# Altium PCB ESP32_MCU.PcbDoc
Units mm, origin at the board's own origin, x right, y up, seen from the top; angles counter-clockwise.
Board outline 139.96 x 71.98 mm, 2 copper layers (Top Layer, Bottom Layer); 34 components, 17 nets, 128 pads, 29 vias.
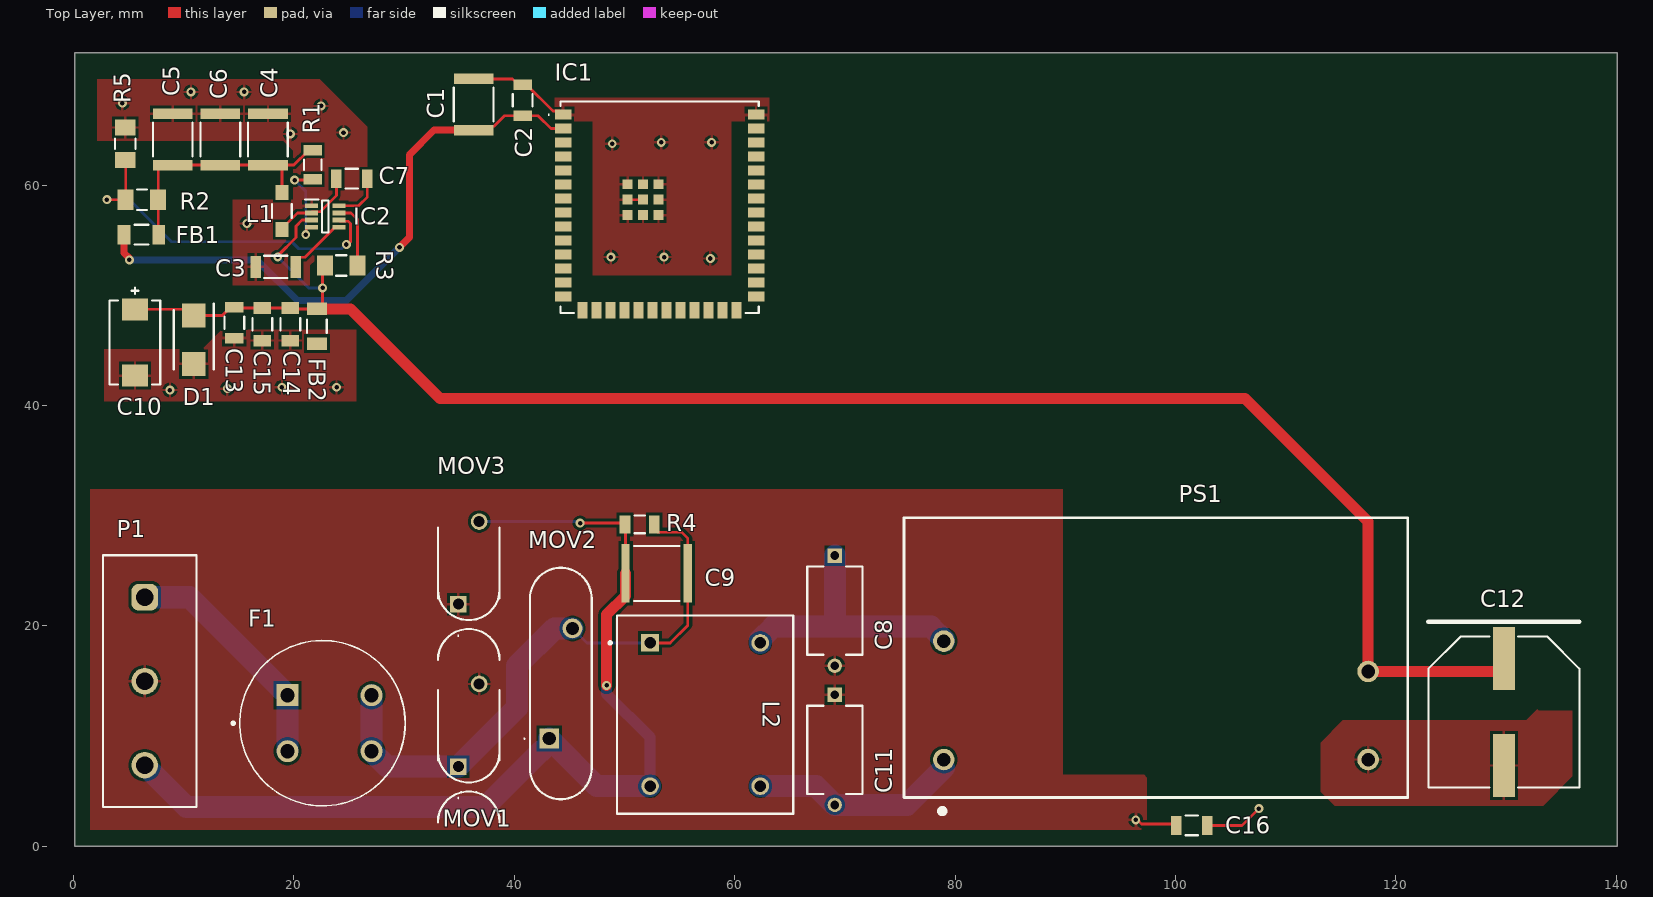
[diagram p0: Top Layer view]
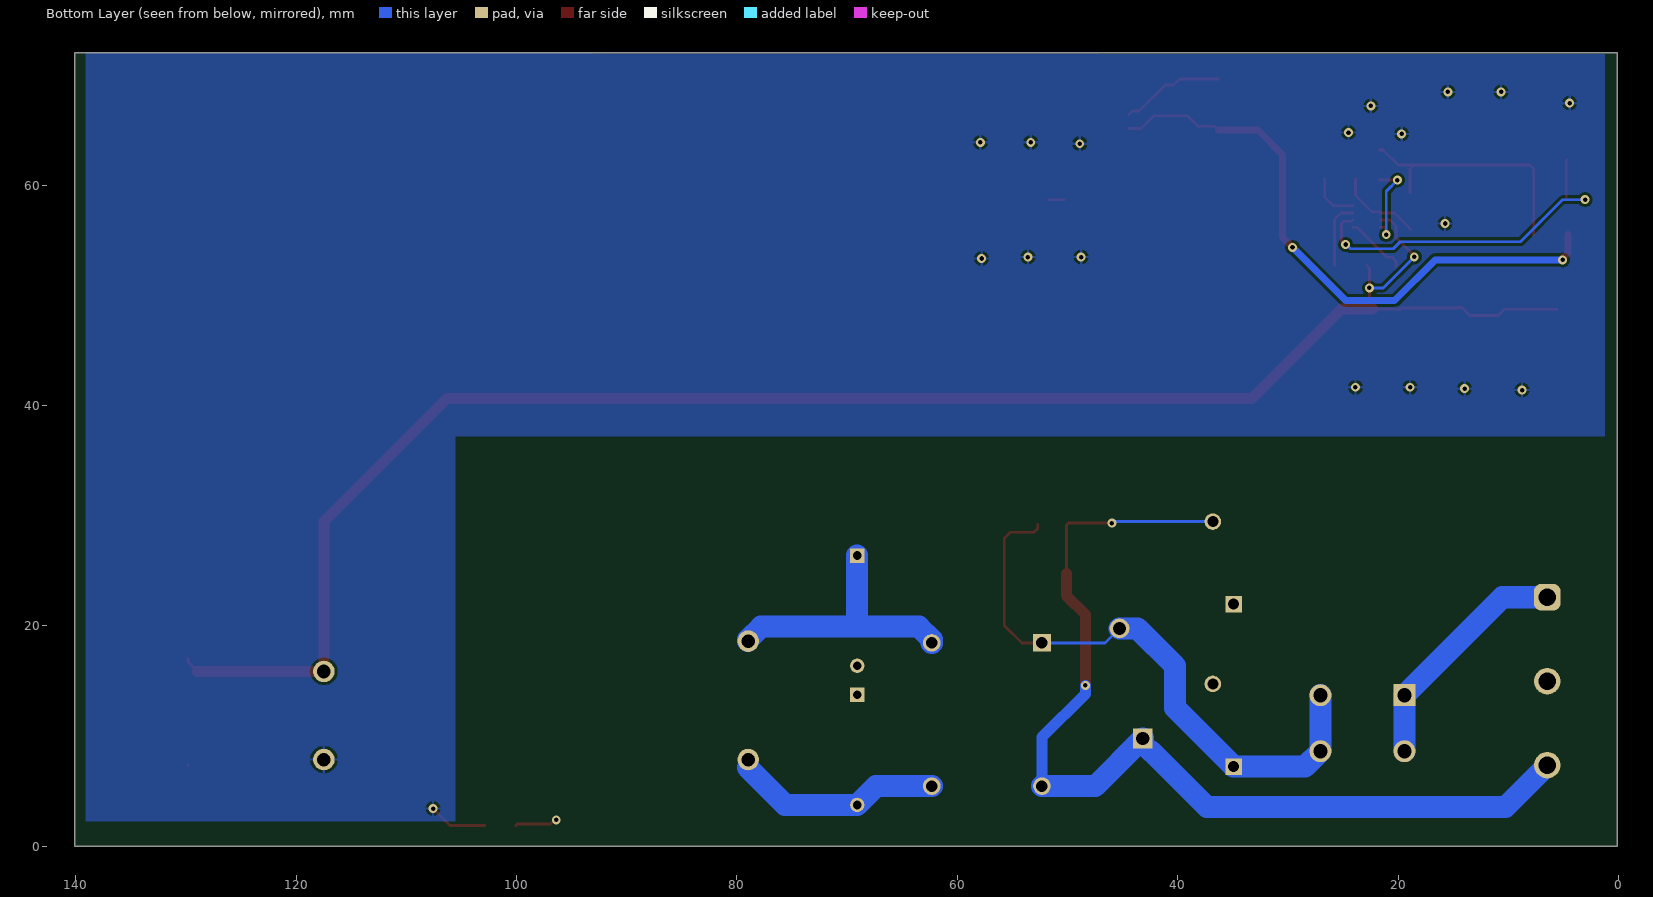
[diagram p1: Bottom Layer view, seen from below]
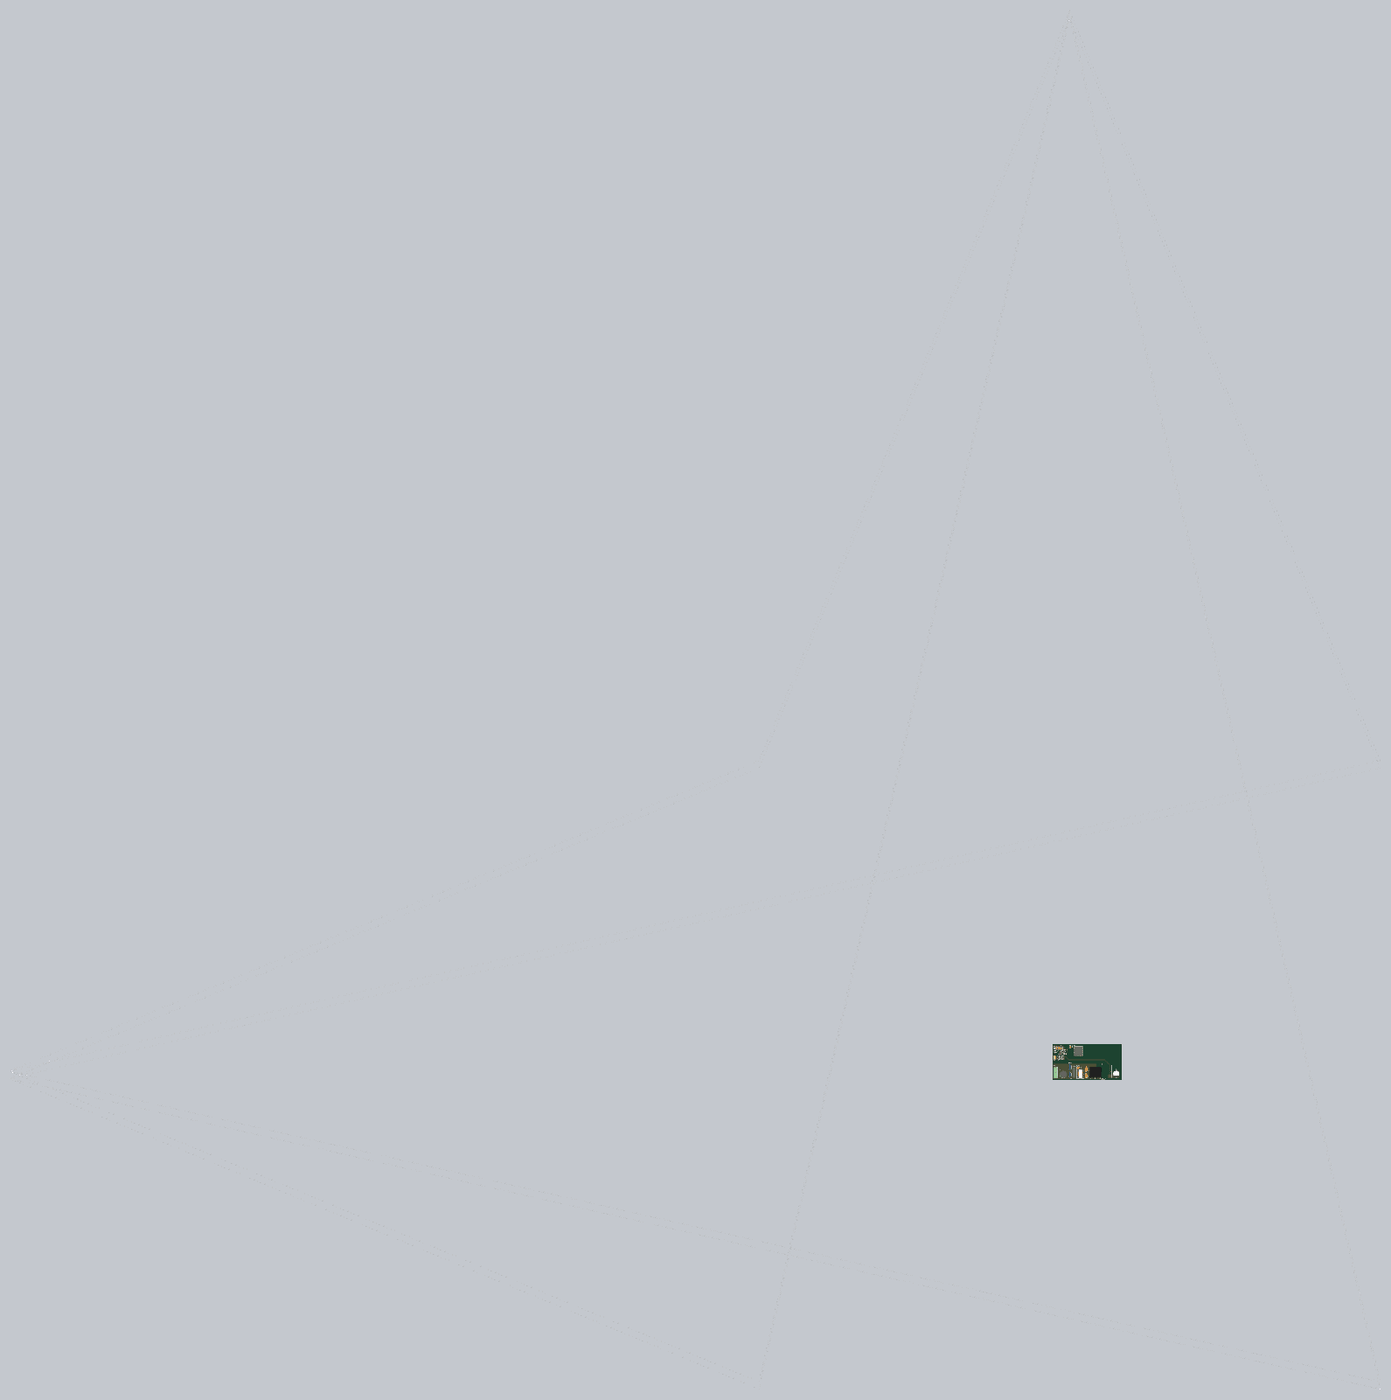
[diagram p2: 3D render of the assembled board from above, using the file's embedded part models]

## Layer stack, top to bottom
Top Solder: solder mask 0.0102, Solder Resist, Dk 3.5
Top Layer: signal copper 0.0356
Dielectric 1: dielectric 0.32, FR-4, Dk 4.8
Bottom Layer: signal copper 0.0356
Bottom Solder: solder mask 0.0102, Solder Resist, Dk 3.5

## Board outline
140.081,0.027 140.081,72.009 0.125,72.009 0.127,0.027

## Design rules (kind name [scope] priority, off if disabled: settings)
Clearance [All] p1: gap=0.254 ignorepadtopadclearanceinfootprint=TRUE except(0.1: Arc-SMDPad Track-SMDPad SMDPad-SMDPad)
MinimumSolderMaskSliver [All] p1: minsoldermaskwidth=0.127
PolygonConnect [All] p1: connectstyle=Relief reliefconductorwidth=0.254 reliefentries=4 polygonreliefangle="90 Angle" airgapwidth=0.254
RoutingVias [All] p1: holewidth=0.41 width=0.81 viastyle="Through Hole" minholewidth=0.4 minwidth=0.8 maxholewidth=0.711 maxwidth=1.27
SilkToSilkClearance [All] p1: silktosilkclearance=0.127
SilkToSolderMaskClearance [IsPad] p1: minsilkscreentomaskgap=0.1 clearancetoexposedcopper=TRUE
SolderMaskExpansion [All] p1: expansion=0.102 istentingtop=FALSE
UnRoutedNet [All] p1: checkbadconnections=TRUE
Width [All] p1: maxlimit=2 minlimit=0.127 preferedwidth=0.254 minimp=50.000000 maximp=50.000000 favimp=50.000000
26 further rules are at their usual default settings.

## Components (designator, comment, footprint, x,y, rotation, side; value= is the part's Value field where it differs from the comment)
C1 "C4532X7R1E226M250KC" FP-C4532-250-0_4-IPC_B 36.322,67.31 r90 top
C2 "C1206C104K2RACTU" FP-C1206C-EB-MFG 40.767,67.694 r90 top value="0.10 μF"
C3 "CGA5H4C0G2W822J115AA" FP-CGA5L-0_3-0_1-IPC_A 18.368,52.578 r180 top
C4 "C4532X7R1E226M250KC" FP-C4532-250-0_4-IPC_B 17.653,64.135 r90 top
C5 "C4532X7R1E226M250KC" FP-C4532-250-0_4-IPC_B 9.017,64.135 r90 top
C6 "C4532X7R1E226M250KC" FP-C4532-250-0_4-IPC_B 13.335,64.135 r90 top
C7 "C1206C104K2RACTU" FP-C1206C-EB-MFG 25.273,60.579 r180 top value="0.10 μF"
C8 "VY1102M31Y5UC63V0" FP-VY1102M31Y5UC63V0-MFG 69.088,21.383 r270 top
C9 "C5750JB2J224K230KA" FP-C5750-230-0_4-IPC_C 52.928,24.765 r180 top
C10 "T491D476K025AT" FP-T491D476K025AT-MFG 5.588,45.72 r90 top
C11 "VY1102M31Y5UC63V0" FP-VY1102M31Y5UC63V0-MFG 69.088,8.763 r270 top
C12 "EEVFK1J221Q" PNSC-FK-V-H13_V 129.794,12.192 r270 top
C13 "C1206C104K2RACTU" FP-C1206C-EB-MFG 14.605,47.498 r270 top value="0.10 μF"
C14 "GRM31CR61H106KA12L" FP-GRM31-0_2-MFG 19.685,47.371 r270 top value=10uF
C15 "GRM31CR61H106KA12L" FP-GRM31-0_2-MFG 17.145,47.371 r270 top value=10uF
C16 "C1206C104K2RACTU" FP-C1206C-EB-MFG 101.473,1.905 r0 top value="0.10 μF"
D1 "SMBJ20A-E3_52" DIOM5436X244N 10.922,45.974 r270 top
F1 "83100000005" FP-831-MFG 22.606,11.176 r0 top
FB1 "BLM31KN801BH1L" FP-BLM31-0_2-t1_6-MFG 6.172,55.499 r180 top
FB2 "BLM31KN801BH1L" FP-BLM31-0_2-t1_6-MFG 22.098,47.193 r270 top
IC1 "ESP32-S3-WROOM-1U-N16" ESP32S3WROOM1UN16 53.192,57.984 r0 top
IC2 "TPS563210ADDFR" SOT65P280X110-8N 22.86,57.15 r0 top
L1 "LQM31PN2R2M00L" FP-LQM31PN_00-MFG 18.923,57.658 r90 top
L2 "PLA10AN2030R5R2B" FP-PLA10A-PLH10A-MFG 57.324,11.961 r0 top
MOV1 "B72210S2301K101" B72210S2301K101 34.925,7.239 r90 top
MOV2 "S20K300" S20K300 43.18,9.779 r90 top
MOV3 "B72210S2301K101" B72210S2301K101 34.925,21.971 r90 top
P1 "691311400103" 691311400103 6.927,14.986 r270 top
PS1 "IRM-10-12" IRM-10 75.375,4.425 r0 top
R1 "CRCW1206100KJNEB" FP-CRCW1206-e3-IPC_C 21.717,61.849 r90 top
R2 "MCA1206MD1002BP100" FP-MCA1206-IPC_A 6.223,58.674 r0 top
R3 "MCA1206MD1002BP100" FP-MCA1206-IPC_A 24.305,52.705 r0 top
R4 "CRCW1206100KJNEB" FP-CRCW1206-e3-IPC_C 51.379,29.21 r0 top
R5 "MCA1206MD1002BP100" FP-MCA1206-IPC_A 4.699,63.754 r270 top

## Footprints (in the part's own frame and the unit in brackets; to place one, negate y for a bottom-side part, rotate by r counter-clockwise, add the part's x,y. Pads: shape width x height; smd on the part's side, far side on the other; paste and mask are expansions set on the pad)
691311400103 [mm] "7.62 mm - Closed Vertical PCB Header - 3p"
  rrect50% 2.4x2.4 hole 1.6: 1(-7.62,-0.45)
  round 2.4 hole 1.6: 2(0,-0.45) 3(7.62,-0.45)
  silkscreen extent -11.42,-4.25 11.42,4.25, body extent -11.43,-4.25 11.43,4.25, height 12.05
B72210S2301K101 [mm]
  rect 1.5x1.5 hole 1: 1(0,0)
  round 1.5 hole 1: 2(7.5,-1.9)
  silkscreen extent -5.05,-3.75 6.95,1.85, body extent -2,-2.5 9.5,0.6, height 13.49
DIOM5436X244N [mm]
  rect 2.2x2.15 smd: 1(-2.2,0) 2(2.2,0)
  silkscreen extent -3.27,-1.81 2.7,1.81, body extent -2.7,-1.81 2.7,1.81, height 2.44
ESP32S3WROOM1UN16 [mm]
  rect 1.5x0.9 smd: 1(-8.75,8.41) 2(-8.75,7.14) 3(-8.75,5.87) 4(-8.75,4.6) 5(-8.75,3.33) 6(-8.75,2.06) 7(-8.75,0.79) 8(-8.75,-0.48) 9(-8.75,-1.75) 10(-8.75,-3.02) 11(-8.75,-4.29) 12(-8.75,-5.56) 13(-8.75,-6.83) 14(-8.75,-8.1) 27(8.75,-8.1) 28(8.75,-6.83) 29(8.75,-5.56) 30(8.75,-4.29) 31(8.75,-3.02) 32(8.75,-1.75) 33(8.75,-0.48) 34(8.75,0.79) 35(8.75,2.06) 36(8.75,3.33) 37(8.75,4.6) 38(8.75,5.87) 39(8.75,7.14) 40(8.75,8.41)
  rect 0.9x1.5 smd: 15(-6.985,-9.35) 16(-5.715,-9.35) 17(-4.445,-9.35) 18(-3.175,-9.35) 19(-1.905,-9.35) 20(-0.635,-9.35) 21(0.635,-9.35) 22(1.905,-9.35) 23(3.175,-9.35) 24(4.445,-9.35) 25(5.715,-9.35) 26(6.985,-9.35)
  rect 0.9x0.9 smd: 41(-1.5,0.69) 42(-1.5,2.09) 43(-2.9,2.09) 44(-2.9,0.69) 45(-2.9,-0.71) 46(-1.5,-0.71) 47(-0.1,-0.71) 48(-0.1,0.69) 49(-0.1,2.09)
  silkscreen extent -10.1,-9.6 9,9.6, body extent -9,-9.6 9,9.6, height 3.45
FP-831-MFG [mm]
  round 2 hole 1.3 paste-2539.97 mask+0: 1(-3.17,-2.54) 2(4.45,-2.54) 2(4.45,2.54)
  rect 2x2 hole 1.3 paste-2539.97 mask+0: 1(-3.17,2.54)
  silkscreen extent -8.22,-7.5 7.5,7.5, body extent -7.6,-7.6 7.6,7.6, height 0.25
FP-BLM31-0_2-t1_6-MFG [mm]
  rect 1.15x1.8 smd paste+0 mask+0: 1(-1.575,0) 2(1.575,0)
  silkscreen extent -0.63,-0.9 0.63,0.9, body extent -2.25,-1 2.25,1, height 0.25
FP-C1206C-EB-MFG [mm]
  rect 0.95x1.7 smd paste+0 mask+0: 1(-1.4,0) 2(1.4,0)
  silkscreen extent -0.55,-0.9 0.55,0.9, body extent -2,-1 2,1, height 0.25
FP-C4532-250-0_4-IPC_B [mm]
  rect 0.953x3.603 smd paste+0 mask+0: 1(-2.325,0) 2(2.325,0)
  silkscreen extent -1.55,-1.8 1.55,1.8, body extent -3.05,-2.05 3.05,2.05, height 0.25
FP-C5750-230-0_4-IPC_C [mm]
  rect 0.753x5.303 smd paste+0 mask+0: 1(-2.825,0) 2(2.825,0)
  silkscreen extent -2.07,-2.5 2.07,2.5, body extent -3.3,-2.8 3.3,2.8, height 0.25
FP-CGA5L-0_3-0_1-IPC_A [mm]
  rect 0.956x2.006 smd paste+0 mask+0: 1(-1.825,0) 2(1.825,0)
  silkscreen extent -1.05,-1 1.05,1, body extent -2.8,-1.5 2.8,1.5, height 0.25
FP-CRCW1206-e3-IPC_C [mm]
  rect 0.956x1.658 smd paste+0 mask+0: 1(-1.326,0) 2(1.326,0)
  silkscreen extent -0.47,-0.8 0.47,0.8, body extent -1.9,-0.97 1.9,0.97, height 0.25
FP-GRM31-0_2-MFG [mm]
  rect 1.05x1.6 smd paste+0 mask+0: 1(-1.475,0) 2(1.475,0)
  silkscreen extent -0.58,-0.9 0.58,0.9, body extent -2.1,-1 2.1,1, height 0.25
FP-LQM31PN_00-MFG [mm]
  rect 1.35x1.2 smd paste+0 mask+0: 1(-1.675,0) 2(1.675,0)
  silkscreen extent -0.63,-0.9 0.63,0.9, body extent -2.45,-1 2.45,1, height 0.25
FP-MCA1206-IPC_A [mm]
  rect 1.456x1.858 smd paste+0 mask+0: 1(-1.476,0) 2(1.476,0)
  silkscreen extent -0.45,-0.93 0.45,0.93, body extent -2.7,-1.43 2.7,1.43, height 0.25
FP-PLA10A-PLH10A-MFG [mm]
  rect 1.6x1.6 hole 1.05 paste-2539.97 mask+0: 1(-5,6.5)
  round 1.6 hole 1.05 paste-2539.97 mask+0: 2(5,6.5) 3(5,-6.5) 4(-5,-6.5)
  silkscreen extent -8.75,-9 8,9, body extent -8.1,-9.1 8.1,9.1, height 0.25
FP-T491D476K025AT-MFG [mm]
  rect 1.99x2.33 smd paste+0 mask+0: 1(-3.01,0) 2(3.01,0)
  silkscreen extent -3.8,-2.3 5,2.3, body extent -4.13,-2.42 4.13,2.42, height 0.25
FP-VY1102M31Y5UC63V0-MFG [mm]
  rect 1.3x1.3 hole 0.8 paste-2539.97 mask+0: 1(-5,0)
  round 1.3 hole 0.8 paste-2539.97 mask+0: 2(5,0)
  silkscreen extent -4,-2.5 4,2.5, body extent -5.75,-2.6 5.75,2.6, height 0.25
IRM-10 [mm]
  round 1.95 hole 1.24: 1(3.6,3.45) 2(42.1,3.45) 3(42.1,11.45) 4(3.6,14.2)
  silkscreen extent 0,-1.34 45.7,25.4, body extent -0.33,-3.69 25.07,21.86, height 22.08
PNSC-FK-V-H13_V [mm] "CAPAE, 2-Leads, Body 13.70x13.70mm"
  rect 5.7x2 smd: 1(-4.85,0) 2(4.85,0)
  silkscreen extent -8.2,-6.85 6.85,6.85, body extent -7.5,-6.85 7.5,6.85, height 14
S20K300 [mm]
  rect 1.8x1.8 hole 1.2: 1(0,0)
  round 1.8 hole 1.2: 2(10,-2.1)
  silkscreen extent -5.5,-3.85 15.5,2.3, body extent -5.5,-3.85 15.5,1.75, height 25.6
SOT65P280X110-8N [mm]
  rect 1.2x0.45 smd: 1(-1.25,0.975) 2(-1.25,0.325) 3(-1.25,-0.325) 4(-1.25,-0.975) 5(1.25,-0.975) 6(1.25,-0.325) 7(1.25,0.325) 8(1.25,0.975)
  silkscreen extent -1.85,-1.45 0.3,1.55, body extent -1.41,-1.45 1.41,1.45, height 0.9

## Part data
C1 C4 C5 C6: library part CMP-08246-003643-1, "Multilayer Ceramic Capacitors 22uF ±20% 25V X7R SMD 1812", Capacitance=22uF, Case Code (Imperial)=1812, Case Code (Metric)=4532, Dielectric=X7R, Dielectric Material=Ceramic, Max Operating Temperature=125°C, Min Operating Temperature=-55°C, Package Quantity=1, Tolerance=20%, Voltage=25V, Case/Package=1812, Construction=Flat, Depth=3.2mm, Height=2.5mm, Lead Free="Lead Free", Length=4.5mm, Mount="Surface Mount", Number of Pins=2, Packaging="Tape and Reel", Radiation Hardening=No, REACH SVHC="No SVHC", Resistor Type=Ceramic, RoHS Compliant=Yes, Series=C, Termination=SMD/SMT, Thickness=0.11inch, Voltage Rating=25V, Voltage Rating (DC)=25V, Weight=0.000952oz, Width=0.126inch
C2 C7 C13 C16: library part CMP-1037-04222-2, "CAP CER 0.1UF 200V 10% X7R 1206", Capacitance="0.10 μF", Manufacturer=KEMET, Package=C1206C-EB, Temperature="-55°C to +150°C", Temperature Characteristic=X7R, Temperature Coefficient=15%, Temperature Range High=+150°C, Temperature Range Low=-55°C, Tolerance=0.1, Voltage Rating="200 V", Automotive=Yes, Automotive Grade="Grade 0", Category=Cap, ComponentLink2Description=Datasheet, ComponentLink2URL=https://content.kemet.com/datasheets/KEM_C1007_X8R_ULTRA_150C_SMD.pdf, Device Class L1="Passive Components", Device Class L2=Capacitors, Device Class L3="Ceramic Capacitors", Digikey Description="CAP CER 0.1UF 200V 10% X7R 1206", Height=0.88mm, Ipc Land Pattern Name=CAPC320160X78, Lead Free=Yes, Manufacturer Part Number=C1206C104K2RACTU, Material=Ceramic, Mouser Description="Multilayer Ceramic Capacitors MLCC - SMD/SMT 200volts 0.1uF X7R 10%", Octopart=https://octopart.com/c1206c104k2ractu-kemet-9138344, RoHS=TRUE
C3: library part CMP-08246-000279-1, "Cap Ceramic 8.2nF 450V C0G 5% Pad SMD 1206 +125°C Automotive T/R", Capacitance=8.2nF, Case Code (Imperial)=1206, Case Code (Metric)=3216, Dielectric=C0G, Max Operating Temperature=125°C, Min Operating Temperature=-55°C, Package Quantity=2000, Ratings=AEC-Q200, Tolerance=5%, Voltage Rating=450V, Case/Package=1206, Composition=Ceramic, Height=1.15mm, Length=0.126inch, Mount="Surface Mount", Packaging="Tape and Reel", Termination=SMD/SMT, Thickness=0.051inch, Voltage Rating (DC)=450V, Width=0.063inch
C8 C11: library part CMP-00030-59531954-1, "VY1102M31Y5UC63V0 1nF 500(Y1)V ac; 760(X1)V ac Ceramic Single Layer Cap; Y5U Dielectric VY1 Series", Capacitance=1nF, Case/Package=Radial, Dielectric=Y5U, Dielectric Material=Ceramic, Max Operating Temperature=125°C, Min Operating Temperature=-40°C, Ratings="X1, Y1", Tolerance=20%, Depth=5mm, Diameter=8mm, Dissipation Factor=2.5%, Height - Seated (Max)=11.9888mm, Lead Pitch=10.0076mm, Lead/Base Style=Kinked, Mount="Through Hole", NexarPartId=59531954, Packaging=Bulk, REACH SVHC=Unknown, RoHS=Compliant, Schedule B="8532230060, 8532230060", Termination=Radial
C9: library part CMP-08246-006666-1, "Multilayer Ceramic Capacitors 220nF ±10% 630V JB SMD 2220", Capacitance=220nF, Case Code (Imperial)=2220, Case Code (Metric)=5750, Max Operating Temperature=85°C, Min Operating Temperature=-25°C, Package Quantity=500, Resistor Type=Ceramic, Tolerance=10%, Voltage Rating=630V, Case/Package=2220, Height=2.3mm, Length=0.224inch, Mount="Surface Mount", Packaging="Tape and Reel", RoHS Compliant=Yes, Series=C, Termination=SMD/SMT, Thickness=0.098inch, Voltage Rating (DC)=630V, Width=5mm
C10: library part CMP-03017-000020-1, "CAP TANT 1UF 10% 25V 2917", Capacitance=1uF, Case Code (Imperial)=2917, Case Code (Metric)=7343, Dielectric Material=Tantalum, ESR (Equivalent Series Resistance)=700mR, Leakage Current=11.8uA, Max Operating Temperature=125°C, Min Operating Temperature=-55°C, Package Quantity=1, Ripple Current=463mA, Tolerance=10%, Voltage=25V, Case/Package=2917, Depth=4.3mm, Dissipation Factor=10%, Failure Rate=0.001%, Features="General Purpose", Height=2.8mm, Height - Seated (Max)=0.122inch, Lead Free="Lead Free", Length=7.3mm, Life (Hours)=2000Hour, Mount="Surface Mount", Number of Pins=2, Packaging="Tape and Reel", Polarity=Polar, Radiation Hardening=No, REACH SVHC="No SVHC", RoHS Compliant=Yes, Termination=SMD/SMT, Voltage Rating=25V, Voltage Rating (DC)=25V, Weight=0.023634oz, Width=4.3mm
C12: library part CMP-2000-06222-1, "Aluminum Electrolytic Capacitor, 220 uF, +/- 20%, 63 V, 2-Pin SMD (Size Code H13), -55 to 105 degC, RoHS, Tape and Reel", AE Capacitor Case=RadialCan-SMD, Capacitance=220µF, Capacitance Tolerance=±20%, Capacitor Case Style=SMD, Life Time @ Temperature=2000hours@105°C, Manufacturer=Panasonic, Operating life Time=2000h, Operating Temperature Max=105°C, Operating Temperature Min=-55°C, Operating Temperature Range=-55°Cto+105°C, Package / Case=H13, Package Description="2-Pin Electrolytic Aluminum Capacitor, Body 13.5 x 13.5 mm", Package Reference=FK-V-H13, Power Factor=0.08, Power Factor Frequency=120Hz, Ripple Current AC=800mA, Ripple Current Frequency=100kHz, Tolerance +=20%, Voltage Rating=63V, Capacitance Tolerance ±=±20%, Capacitor Terminals=SMD, Datasheet URL=https://industrial.panasonic.com/cdbs/www-data/pdf/RDE0000/ABA0000C1181.pdf, Datasheet Version=03/2016, Diameter=12.5mm, External Length / Height=13.5mm, Height=13.5mm, Impedance=0.16ohm, Lifetime @ Temperature=2000hours@105°C, Manufacturer URL=http://www.panasonic.com/, Mounting Technology=SurfaceMount, Operating Lifetime=2000h, Package URL=http://industrial.panasonic.com/cdbs/www-data/pdf/RDE0000/DME0000COL48.pdf, Packaging=CutTape, Product Range=PANASONIC-?????FK, Ripple Current Temperature=105°C, Series=FK, SVHC=NoSVHC(16-Dec-2013), Tolerance -=20%, Voltage Rating V DC=63V
C14 C15: library part CMP-2000-05256-2, "CAP CER 10UF 50V X5R 1206", Capacitance=10uF, Manufacturer="Murata Electronics North America", Package=GRM31-0.2, Temperature="-55°C to +85°C", Temperature Characteristic=X5R, Temperature Coefficient=15%, Temperature Range High=+85°C, Temperature Range Low=-55°C, Tolerance=10%, Voltage Rating=50V, Automotive=No, Category=Cap, ComponentLink2Description=Datasheet, ComponentLink2URL=https://search.murata.co.jp/Ceramy/image/img/A01X/G101/ENG/GRM31CR61H106KA12-01A.pdf, Device Class L1="Passive Components", Device Class L2=Capacitors, Device Class L3="Ceramic Capacitors", Digikey Description="CAP CER 10UF 50V X5R 1206", Height=1.8mm, Lead Free=Yes, Manufacturer Part Number=GRM31CR61H106KA12L, Material=Ceramic, Mouser Description="Multilayer Ceramic Capacitors MLCC - SMD/SMT 1206 10uF 50volt X5R +/-10%", Octopart=https://octopart.com/grm31cr61h106ka12l-murata-18903335, RoHS=TRUE
D1: "TVS Diode (Uni-directional)", Arrow Part Number=SMBJ20A-E3/52, Manufacturer_Name=Vishay, Mouser Part Number=625-SMBJ20A-E3, Arrow Price/Stock=https://www.arrow.com/en/products/smbj20a-e352/vishay?region=nac, Datasheet Link=http://www.vishay.com/docs/88392/smbj.pdf, Height=2.44mm, Manufacturer_Part_Number=SMBJ20A-E3/52, Mouser Price/Stock=https://www.mouser.co.uk/ProductDetail/Vishay-General-Semiconductor/SMBJ20A-E3-52?qs=%252BKsK5HlK7GGHijeGSDEfxQ%3D%3D
F1: library part CMP-08604-000006-1, "FUSE HOLDER CART 250V 6.3A PCB", Fuse Current=16A, Manufacturer="Littelfuse Inc", Package=831, Temperature="-25°C to +70°C", Temperature Range High=+70°C, Temperature Range Low=-25°C, Voltage Rating Ac=250V, Automotive=No, Category=Fuse, ComponentLink2Description=Datasheet, ComponentLink2URL=https://www.littelfuse.com/~/media/electronics/datasheets/fuse_holders/littelfuse_fuse_holder_830_831_834_datasheet.pdf.pdf, Conn Orientation=Vertical, Device Class L1="Circuit Protection", Device Class L2="Fuse Holders", Device Class L3=unset, Digikey Description="FUSE HOLDER CART 250V 6.3A PCB", Height=32.8mm, Lead Free=Yes, Manufacturer Part Number=83100000005, Mouser Description="Fuse Holder 5x20MM PCB MNT VERT BODY ONLY 4P", Number Of Fuses=1, Octopart=https://octopart.com/83100000005-littelfuse-743619, RoHS=TRUE, Standoff Height=0.6mm, Voltage Rating Dc=250V
FB1 FB2: library part CMP-06046-002315-1, "Chip Ferrite Bead, 1206, 800Ω @ 100MHz, 0.05Ω, 25%, 1.7A", Case Code (Imperial)=1206, Case Code (Metric)=3216, DC Resistance (DCR)=50mR, Max Current Rating=1.7A, Max Operating Temperature=150°C, Min Operating Temperature=-55°C, Ratings=AEC-Q200, Case/Package=1206, Mount="Surface Mount", Number of Lines=1, Packaging="Cut Tape", RoHS Compliant=Yes
IC1: "Integrated Circuit", Manufacturer_Name="Espressif Systems", Mouser Part Number=356-ESP32S3WROM1UN16, Datasheet Link=https://www.espressif.com/sites/default/files/documentation/esp32-s3-wroom-1_wroom-1u_datasheet_en.pdf, Height=3.35mm, Manufacturer_Part_Number=ESP32-S3-WROOM-1U-N16, Mouser Price/Stock=https://www.mouser.co.uk/ProductDetail/Espressif-Systems/ESP32-S3-WROOM-1U-N16?qs=Li%252BoUPsLEntAI1ynUyotnA%3D%3D
IC2: "Integrated Circuit", Manufacturer_Name="Texas Instruments", Mouser Part Number=595-TPS563210ADDFR, Arrow Part Number=TPS563210ADDFR, Arrow Price/Stock=https://www.arrow.com/en/products/tps563210addfr/texas-instruments, Datasheet Link=http://www.ti.com/lit/gpn/TPS563210A, Height=1.1mm, Manufacturer_Part_Number=TPS563210ADDFR, Mouser Price/Stock=https://www.mouser.co.uk/ProductDetail/Texas-Instruments/TPS563210ADDFR?qs=0C8XhJW8e4r80ZvhGvpDUQ%3D%3D
L1: library part CMP-06042-016285-1, "FIXED IND 2.2UH 900MA 190 MOHM", Case Code (Imperial)=1206, Case Code (Metric)=3216, Current Rating=900mA, DC Resistance (DCR)=190mR, Inductance=2.2uH, Inductance Tolerance=20%, Max Operating Temperature=125°C, Min Operating Temperature=-40°C, Package Quantity=3000, Self Resonant Frequency=40MHz, Test Frequency=1MHz, Case/Package=1206, Core Material=Ferrite, DC Current=900mA, Depth=1.8mm, Height=0.85mm, Lead Free="Lead Free", Length=3.2mm, Max DC Current=900mA, Military Standard=Not, Mount="Surface Mount", Packaging="Tape and Reel", Radiation Hardening=No, Rated Current-Max=900mA, REACH SVHC="No SVHC", RoHS Compliant=Yes, Series=LQM31P, Shielding=Shielded, Termination=SMD/SMT, Tolerance=20%, Width=1.6mm
L2: library part CMP-06045-000412-1, "Common Mode Choke Dual 20mH 0.5A 1.8Ω DCR Thru-Hole Bulk", Current=500mA, Current Rating=500uA, DC Resistance (DCR)=100mR, Inductance=20mH, Insulation Resistance=100MR, Max Operating Temperature=120°C, Min Operating Temperature=-25°C, Package Quantity=1260, Voltage Rating=300V, DC Current=500mA, Depth=16mm, Height=17.5mm, Lead Diameter=0.9mm, Lead Free="Lead Free", Lead Pitch=13mm, Lead/Base Style=Pin, Length=18mm, Max DC Current=500mA, Military Standard=Not, Mount="Through Hole", Number of Lines=2, Number of Pins=4, Packaging=Bulk, Parameter 1=2x20mH, Radiation Hardening=No, REACH SVHC="No SVHC", RMS Current (Irms)=500mA, Shielding=Unshielded, Termination=Radial, Voltage Rating (AC)=300V, Voltage Rating (DC)=300V, Width=0.63inch
MOV1 MOV3: "Varistor", Manufacturer_Name=TDK, Mouser Part Number=871-B72210S2301K101, Arrow Part Number=B72210S2301K101, Arrow Price/Stock=https://www.arrow.com/en/products/b72210s2301k101/tdk?region=nac, Datasheet Link=https://product.tdk.com/system/files/dam/doc/product/protection/voltage/lead-disk-varistor/data_sheet/70/db/var/siov_leaded_advanced.pdf, Height=14.5mm, Manufacturer_Part_Number=B72210S2301K101, Mouser Price/Stock=https://www.mouser.co.uk/ProductDetail/EPCOS-TDK/B72210S2301K101?qs=xN3cbABbNRaO1wG4NhAEjg%3D%3D
MOV2: "Varistor", Manufacturer_Name=TDK, Datasheet Link=https://www.tdk-electronics.tdk.com/inf/70/db/var/SIOV_Leaded_StandarD.pdf, Height=25.5mm, Manufacturer_Part_Number=S20K300
P1: library part CMP-1502-02409-2, Color=Green, Current=20A, Max Operating Temperature=105°C, Min Operating Temperature=-40°C, Voltage=300V, Contact Material=Brass, Current Rating=20A, Gender=Male, Height=12.15mm, Lead Pitch=7.62mm, Length=8.5mm, Mount="Through Hole", NexarPartId=18818299, Number of Contacts=3, Number of Levels=1, Number of Pins=3, Number of Positions Per Level=3, Number of Rows=1, Orientation=Vertical, Packaging=Box, Pitch=7.62mm, REACH SVHC=Unknown, RoHS=Compliant, Termination=Solder, Voltage Rating=300V, Width=22.86mm
PS1: "Power Supply", Manufacturer_Name="Mean Well", Mouser Part Number=709-IRM10-12, Arrow Part Number=IRM-10-12, Arrow Price/Stock=https://www.arrow.com/en/products/irm-10-12/mean-well-enterprises?region=europe, Datasheet Link=https://www.meanwellusa.com/webapp/product/search.aspx?prod=IRM-10, Manufacturer_Part_Number=IRM-10-12, Mouser Price/Stock=https://www.mouser.co.uk/ProductDetail/MEAN-WELL/IRM-10-12?qs=WkdRfq4wf1Mps3oD7xn11w%3D%3D
R1: library part CMP-02407-009021-1, "RES Thick Film, 100kΩ, 5%, 0.25W, 200ppm/°C, 1206", Case Code (Imperial)=1206, Case Code (Metric)=3216, Max Operating Temperature=155°C, Max Power Dissipation=250mW, Min Operating Temperature=-55°C, Package Quantity=10000, Resistance=100kR, Temperature Coefficient=200ppm/°C, Tolerance=5%, Voltage Rating=200V, Case/Package=1206, Composition="Thick Film", Contact Plating=Tin, Features="Automotive AEC-Q200", Height=0.024inch, Lead Free="Lead Free", Length=0.126inch, Number of Terminations=2, Packaging="Tape and Reel", Power Rating=250mW, Radiation Hardening=No, Weight=0.000353oz, Width=0.063inch
R2: library part CMP-02407-000300-1, "Res MC AT Precision Thin Film 1206 3.74kΩ 0.1% 0.4W ±25ppm/°C Molded Paper T/R", Case Code (Imperial)=1206, Case Code (Metric)=3216, Max Operating Temperature=155°C, Max Power Dissipation=400mW, Min Operating Temperature=-55°C, Package Quantity=1000, Resistance=3.74kR, Temperature Coefficient=25ppm/°C, Tolerance=0.1%, Voltage Rating=200V, Case/Package=1206, Composition="Thin Film", Features="Automotive AEC-Q200", Height=0.026inch, Length=0.126inch, Number of Terminations=2, Packaging="Tape and Reel", Power Rating=400mW, Termination=SMD/SMT, Weight=0.000353oz, Width=0.063inch
R3: library part CMP-02407-000300-1, "Res MC AT Precision Thin Film 1206 10kΩ 0.1% 0.4W ±25ppm/°C Molded Paper T/R", Case Code (Imperial)=1206, Case Code (Metric)=3216, Max Operating Temperature=155°C, Max Power Dissipation=400mW, Min Operating Temperature=-55°C, Package Quantity=1000, Resistance=10kR, Temperature Coefficient=25ppm/°C, Tolerance=0.1%, Voltage Rating=200V, Case/Package=1206, Composition="Thin Film", Features="Automotive AEC-Q200", Height=0.026inch, Length=0.126inch, Number of Terminations=2, Packaging="Tape and Reel", Power Rating=400mW, Termination=SMD/SMT, Weight=0.000353oz, Width=0.063inch
R4: library part CMP-02407-009021-1, "RES Thick Film, 1M, 5%, 0.25W, 200ppm/°C, 1206", Case Code (Imperial)=1206, Case Code (Metric)=3216, Max Operating Temperature=155°C, Max Power Dissipation=250mW, Min Operating Temperature=-55°C, Package Quantity=10000, Resistance=1MR, Temperature Coefficient=200ppm/°C, Tolerance=5%, Voltage Rating=200V, Case/Package=1206, Composition="Thick Film", Contact Plating=Tin, Features="Automotive AEC-Q200", Height=0.024inch, Lead Free="Lead Free", Length=0.126inch, Number of Terminations=2, Packaging="Tape and Reel", Power Rating=250mW, Radiation Hardening=No, Weight=0.000353oz, Width=0.063inch
R5: library part CMP-02407-000300-1, "Res MC AT Precision Thin Film 1206 33.2kΩ 0.1% 0.4W ±25ppm/°C Molded Paper T/R", Case Code (Imperial)=1206, Case Code (Metric)=3216, Max Operating Temperature=155°C, Max Power Dissipation=400mW, Min Operating Temperature=-55°C, Package Quantity=1000, Resistance=33.2kR, Temperature Coefficient=25ppm/°C, Tolerance=0.1%, Voltage Rating=200V, Case/Package=1206, Composition="Thin Film", Features="Automotive AEC-Q200", Height=0.026inch, Length=0.126inch, Number of Terminations=2, Packaging="Tape and Reel", Power Rating=400mW, Termination=SMD/SMT, Weight=0.000353oz, Width=0.063inch

## Via types
v1: diameter 0.81, hole 0.41, Top Layer to Bottom Layer, 29 vias

## Nets (pads, with @x,y where several pads share a name; then routed paths per layer and width w, separated by ;. In a path a pad name is that pad's centre, name@x,y a point inside that pad or via, vN(x,y) a via of type N, cw(c..) or ccw(c..) an arc to the next point about the centre after c; other vN are vias at no path point)
+3.3V: C1.1 C2.1 FB1.2 IC1.2 | length 55.2
  Top Layer w0.254: v1(5.08,53.213) v1@5.08,53.359 ; C1.1 36.672,65.335 38.157,65.335 39.116,66.294 C2.1 42.164,66.294 43.334,65.124 IC1.2
  Top Layer w0.64: FB1.2 4.597,53.842 v1@5.08,53.359 ; v1(29.591,54.356) 30.48,55.245 30.48,62.738 32.727,64.985 C1.1
  Bottom Layer w0.64: v1(5.08,53.213) 16.637,53.213 20.32,49.53 24.765,49.53 v1(29.591,54.356)
+12V: FB2.2
EARTH: C8.2 C11.1 C16.1 MOV1.2 MOV3.1 P1.2 | length 3.9
  Top Layer w0.254: v1(96.393,2.413) 96.543,2.413 96.924,2.032 99.946,2.032 C16.1
GND: C1.2 C2.2 C3.2 C4.2 C5.2 C6.2 C10.1 C12.2 C13.2 C14.2 C15.2 C16.2 D1.2 IC1.1 IC1.40 IC1.41 IC1.42 IC1.43 IC1.44 IC1.45 IC1.46 IC1.47 IC1.48 IC1.49 IC2.1 PS1.2 R5.1 | length 16.2
  Top Layer w0.254: C1.2 39.851,69.635 40.392,69.094 C2.2 41.142,69.094 43.519,66.717 44.119,66.717 IC1.1 ; IC1.44 IC1.41 ; C16.2 106.045,1.905 v1(107.569,3.429) ; C12.2 C12.2@129.794,7.382
  other v1: 8.763,41.402 13.97,41.529 18.923,41.656 23.876,41.656 57.798,53.34 48.768,53.467 53.594,53.467 15.748,56.515 48.895,63.754 53.34,63.881 57.912,63.881 19.685,64.643 24.511,64.77 22.479,67.183 4.445,67.437 10.668,68.453 15.494,68.453
NetC3_1: C3.1 IC2.5 | length 5.7
  Top Layer w0.254: C3.1 20.193,53.103 20.544,53.454 21.014,53.454 23.735,56.175 IC2.5
NetC4_1: C4.1 C5.1 C6.1 FB1.1 L1.2 R1.2 R2.2 | length 23.3
  Top Layer w0.254: FB1.1 7.699,55.547 R2.2 7.699,61.46 8.049,61.81 C5.1 C6.1 C4.1 C4.1@18.573,61.81 ; L1.2 18.923,61.46 C4.1@18.573,61.81 ; R1.2 21.366,63.175 20.001,61.81 C4.1@18.573,61.81
NetC7_1: C7.1 IC2.8 | length 4.5
  Top Layer w0.254: IC2.8 25.867,58.125 26.673,58.931 C7.1
NetC7_2: C7.2 IC2.2 L1.1 | length 7.8
  Top Layer w0.254: L1.1 18.923,56.058 20.34,57.475 IC2.2 21.708,57.573 22.394,57.573 23.873,59.052 C7.2
NetC8_1: C8.1 L2.2 PS1.4 | length 24.5
  Bottom Layer w2: L2.2 62.324,18.767 63.496,19.939 69.088,19.939 ; C8.1 69.088,19.939 ; PS1.4 78.975,18.767 77.803,19.939 69.088,19.939
NetC9_1: C9.1 F1.2 L2.1 MOV1.1 MOV2.2 R4.2 | length 55.5
  Top Layer w0.254: L2.1 54.148,18.461 55.753,20.066 C9.1 55.753,27.94 55.185,28.508 53.056,28.508 52.705,28.859 R4.2
  Bottom Layer w0.254: MOV1.1 MOV1.1@35.548,7.862 ; MOV2.2 46.598,18.461 L2.1
  Bottom Layer w2: F1.2@27.056,13.716 27.056,8.636 28.453,7.239 MOV1.1 40.259,12.573 40.259,16.383 43.655,19.779 MOV2.2
NetC9_2: C9.2 L2.4 MOV2.1 MOV3.2 P1.3 R4.1 | length 91.5
  Top Layer w0.254: v1(45.974,29.337) 49.926,29.337 R4.1 50.103,29.16 C9.2
  Top Layer w1: v1(48.387,14.605) 48.387,21.021 50.103,22.737 C9.2
  Bottom Layer w0.254: MOV3.2 45.84,29.471 v1(45.974,29.337) ; 42.455,8.673 42.455,9.054 MOV2.1
  Bottom Layer w1: v1(48.387,14.605) 48.387,13.843 52.324,9.906 L2.4
  Bottom Layer w2: P1.3 10.287,3.556 37.338,3.556 42.455,8.673 ; MOV2.1 47.498,5.461 L2.4
NetC10_2: C10.2 C12.1 C13.1 C14.1 C15.1 D1.1 FB2.1 IC2.3 PS1.3 R3.1 | length 161.5
  Top Layer w0.254: C10.2 10.366,48.73 D1.1 13.506,48.174 14.23,48.898 C13.1 14.657,48.846 C15.1 C14.1 19.763,48.768 FB2.1 22.285,48.768 22.606,49.089 v1(22.606,50.673) 22.606,52.482 R3.1 ; v1(18.542,53.488) 18.542,53.594 20.193,55.245 20.193,56.261 20.757,56.825 IC2.3 ; C12.1@128.921,15.875 129.794,16.748 C12.1
  Top Layer w1: FB2.1@22.285,48.768 22.733,48.768 25.146,48.768 33.274,40.64 106.299,40.64 117.475,29.464 PS1.3 C12.1@128.921,15.875
  Bottom Layer w0.254: v1(18.542,53.488) 21.357,50.673 v1(22.606,50.673)
NetC11_2: C11.2 L2.3 PS1.1 | length 18.8
  Bottom Layer w2: L2.3 67.39,5.461 C11.2 75.617,3.763 PS1.1@78.994,7.14
NetF1_1: F1.1 P1.1 | length 22
  Top Layer w0.254: P1.1 P1.1@6.639,22.444
  Bottom Layer w2: P1.1 10.546,22.606 19.436,13.716 F1.1@19.436,8.636
NetIC2_4: IC2.4 R1.1 | length 8.2
  Top Layer w0.254: v1(20.066,60.452) 21.646,60.452 R1.1 ; v1(21.082,55.499) 21.137,55.554 21.137,56.077 21.235,56.175 IC2.4
  Bottom Layer w0.254: v1(20.066,60.452) 21.082,59.436 v1(21.082,55.499)
NetIC2_6: IC2.6 R2.1 R5.2 | length 32.3
  Top Layer w0.254: v1(3.048,58.674) R2.1 4.747,62.23 R5.2 ; IC2.6 24.208,56.727 24.934,56.727 25.146,56.515 25.146,54.864 24.892,54.61 v1(24.765,54.61)
  Bottom Layer w0.254: v1(3.048,58.674) 5.08,58.674 8.89,54.864 19.812,54.864 20.447,54.229 24.338,54.229 24.719,54.61 v1(24.765,54.61)
NetIC2_7: IC2.7 R3.2 | length 6.1
  Top Layer w0.254: IC2.7 25.202,57.475 25.781,56.896 R3.2
pads on no net: IC1.3 IC1.4 IC1.5 IC1.6 IC1.7 IC1.8 IC1.9 IC1.10 IC1.11 IC1.12 IC1.13 IC1.14 IC1.15 IC1.16 IC1.17 IC1.18 IC1.19 IC1.20 IC1.21 IC1.22 IC1.23 IC1.24 IC1.25 IC1.26 IC1.27 IC1.28 IC1.29 IC1.30 IC1.31 IC1.32 IC1.33 IC1.34 IC1.35 IC1.36 IC1.37 IC1.38 IC1.39

## Polygon pours and split planes (outlines as drawn)
GND on Top Layer "NONET_L-01_P-001" (solid, remove dead copper, pour order 5): 14.478,50.927 21.463,50.927 21.463,52.705 26.67,57.912 26.67,65.278 22.352,69.596 2.159,69.596 2.159,64.008 19.05,64.008 19.939,63.119 19.939,58.674 14.478,58.674
GND on Top Layer "NONET_L-01_P-001" (solid, remove dead copper, pour order 4): 131.826,11.43 115.189,11.43 113.157,9.398 113.157,4.953 114.427,3.683 133.35,3.683 136.017,6.35 136.017,12.319 132.969,12.319 132.842,12.446
GND on Top Layer "NONET_L-01_P-001" (solid, remove dead copper, pour order 3): 2.794,40.386 25.654,40.386 25.654,46.863 13.462,46.863 11.684,45.085 2.794,45.085 2.794,44.577
GND on Top Layer "NONET_L-01_P-001" (solid, remove dead copper, pour order 2): 59.69,65.786 63.119,65.786 63.119,67.945 43.688,67.945 43.688,65.786 47.117,65.786 47.117,51.816 59.69,51.816
EARTH on Top Layer "NONET_L-01_P-001" (solid, remove dead copper, pour order 0): 89.789,6.477 97.155,6.477 97.409,6.223 97.409,1.524 1.524,1.524 1.524,32.385 89.789,32.385
GND on Bottom Layer "NONET_L-01_P-001" (solid, remove dead copper, pour order 1): 1.27,71.88 1.27,37.211 105.537,37.211 105.537,2.286 139.065,2.286 139.065,72.008

## Silkscreen, mask and mechanical layers (free items; w line width, h text height)
Board:
  lines w1: 0.203,0.127 140.203,0.127 140.203,72.127 0.203,72.127 0.203,0.127